# EAGLE board TestFanTachoInterrupt (EAGLE 6.1)
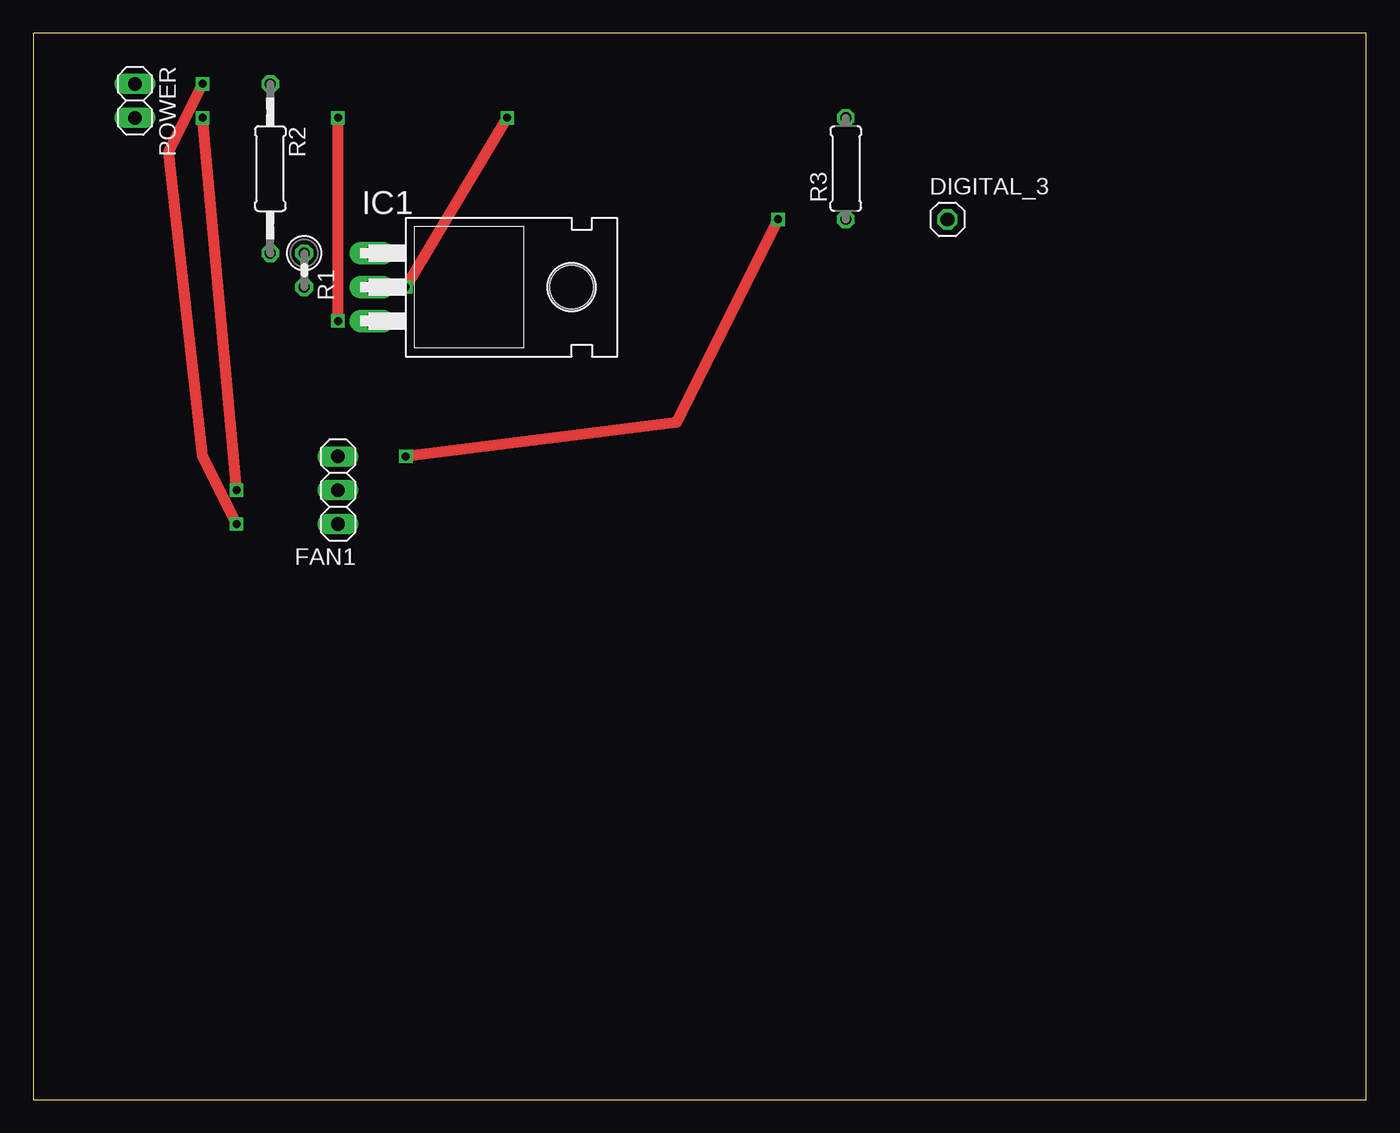
[diagram p0: board, top side]
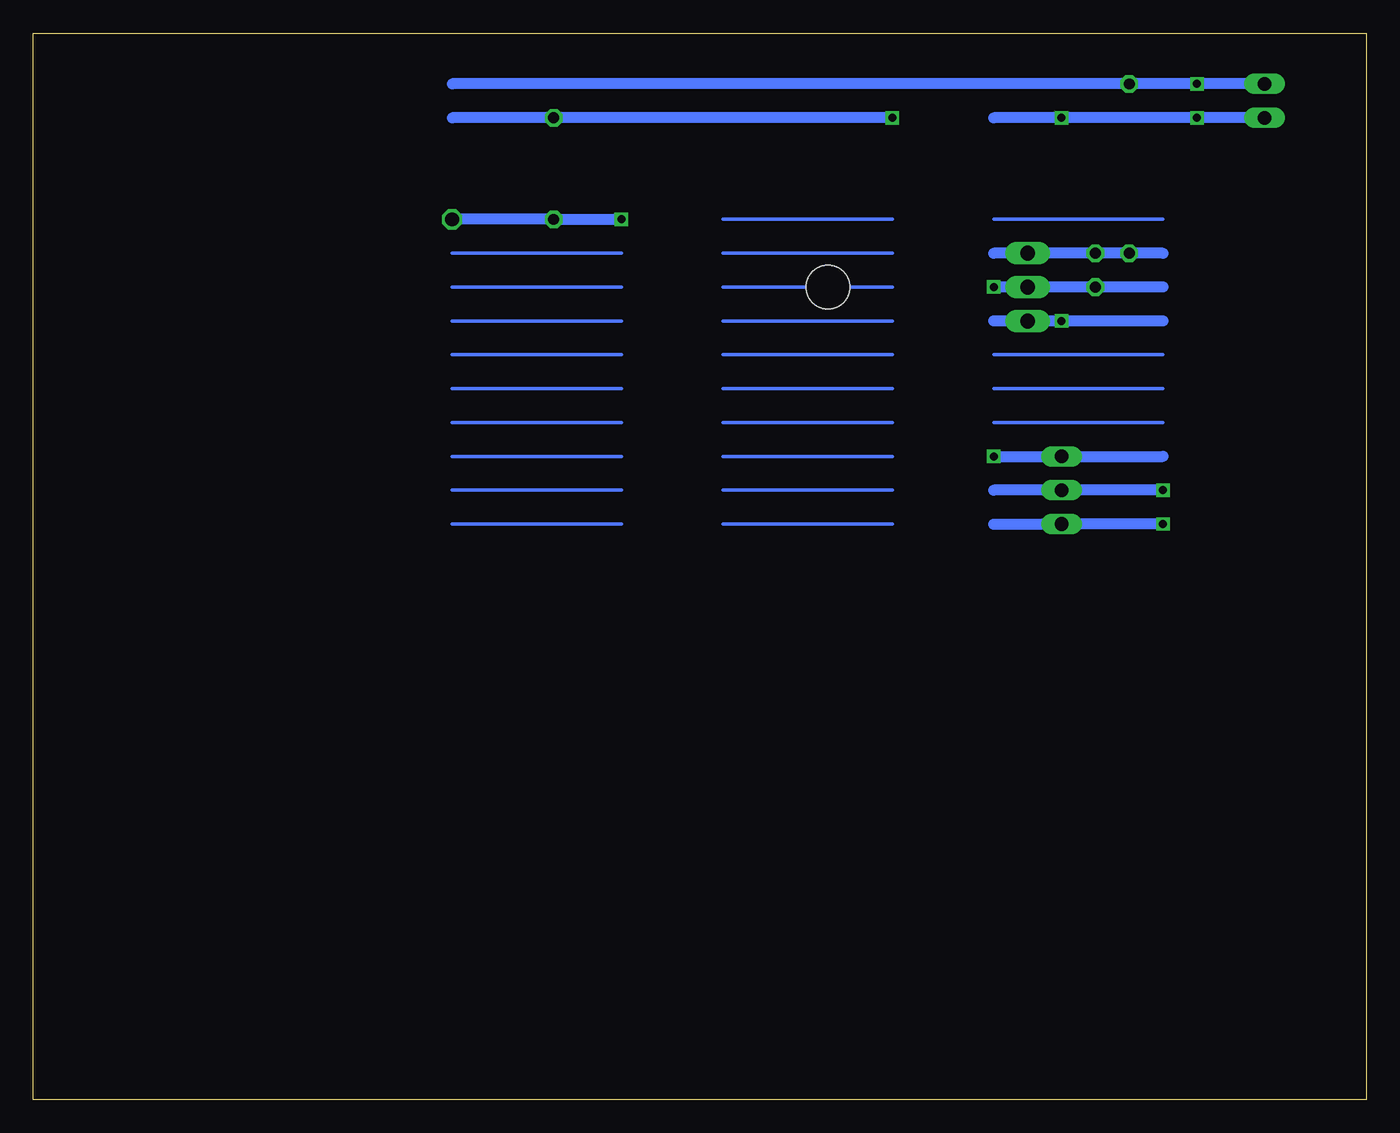
[diagram p1: board, bottom side, seen from below]

Size 100 x 80 mm. Coordinates in mm from the lower left corner, seen from the top.
Outline: 0,0 100,0 100,80 0,80 0,0
Copper layers (1*16): Top 0.035mm / dielectric 1.5mm / Bottom 0.035mm
Design rules: minimum track width 10mil, minimum drill 24mil, track to track 8mil, track to pad 8mil, pad to pad 8mil, via to via 8mil, smd to smd 8mil, copper to edge 40mil, drill to drill 8mil, minimum pad ring 10mil, minimum via ring 8mil, stop-mask expansion 4mil, vias tented up to drill 0mil, thermal gap 10mil

## Footprints (pad centres in the part's own frame; a part is rotated, then mirrored left to right if it is on the bottom)
1X01 = drill 1.016 octagon: 1 0,0
1X03 = drill 1.016 long: 1 -2.54,0; 2 0,0; 3 2.54,0
TO220H = drill 1.118 long: 1 -2.54,-10.16; 2 0,-10.16; 3 2.54,-10.16 | hole 3.302: 0,4.826
1X02 = drill 1.016 long: 1 -1.27,0; 2 1.27,0
0207/2V = drill 0.813 octagon: 1 -1.27,0; 2 1.27,0
0207/12 = drill 0.813 octagon: 1 -6.35,0; 2 6.35,0
0207/7 = drill 0.813 octagon: 1 -3.81,0; 2 3.81,0

## Placement (x,y rotation side)
DIGITAL_3  [1X01]  68.58,66.04 0 top
FAN1  [1X03]  22.86,45.72 270 top
IC1  317T  [TO220H]  35.56,60.96 270 top
POWER  [1X02]  7.62,74.93 270 top
R1  330  [0207/2V]  20.32,62.23 270 top
R2  1k  [0207/12]  17.78,69.85 270 top
R3  10k  [0207/7]  60.96,69.85 90 top

## Library data of the parts
DIGITAL_3 FAN1 = pinhead
IC1 POWER = Rodentometer
R1 = EnigmaMon
R2 R3 = rcl

## Nets
+12V: FAN1.2 IC1.3 POWER.2
FAN1_TACHO: DIGITAL_3.1 FAN1.1 R3.1
GND: FAN1.3 POWER.1 R2.1
N$1: IC1.1 R1.1 R2.2
VCC: IC1.2 R1.2 R3.2

## Tracks (layer width: path | path; a pad name or v marks a point on that pad's centre or on a via)
+12V  (via drill 0.6)
  Top 0.813: v22.86,58.42 v22.86,73.66 | v15.24,45.72 v12.7,73.66
  Bottom 0.406: IC1.3 v22.86,58.42
  Bottom 0.813: POWER.2 v12.7,73.66 v22.86,73.66 27.94,73.66 | v15.24,45.72 FAN1.2 27.94,45.72
FAN1_TACHO  (via drill 0.6)
  Top 0.813: v55.88,66.04 48.26,50.8 v27.94,48.26
  Bottom 0.813: DIGITAL_3.1 R3.1 v55.88,66.04 | v27.94,48.26 FAN1.1 15.24,48.26
GND  (via drill 0.6)
  Top 0.813: v15.24,43.18 12.7,48.26 10.16,71.12 v12.7,76.2
  Bottom 0.813: POWER.1 v12.7,76.2 R2.1 68.58,76.2 | v15.24,43.18 FAN1.3 27.94,43.18
N$1
  Bottom 0.406: R2.2 R1.1 IC1.1
N$2
  Bottom 0.254: 35.56,66.04 48.26,66.04
N$3
  Bottom 0.254: 15.24,66.04 27.94,66.04
N$4
  Bottom 0.813: 15.24,63.5 27.94,63.5
N$5
  Bottom 0.813: 15.24,58.42 27.94,58.42
N$6
  Bottom 0.254: 15.24,55.88 27.94,55.88
N$7
  Bottom 0.254: 15.24,53.34 27.94,53.34
N$8
  Bottom 0.254: 15.24,50.8 27.94,50.8
N$10
  Bottom 0.254: 35.56,63.5 48.26,63.5
N$12
  Bottom 0.254: 35.56,60.96 48.26,60.96
N$13
  Bottom 0.254: 35.56,58.42 48.26,58.42
N$14
  Bottom 0.254: 35.56,55.88 48.26,55.88
N$15
  Bottom 0.254: 35.56,53.34 48.26,53.34 | 35.56,50.8 48.26,50.8 | 35.56,48.26 48.26,48.26 | 35.56,45.72 48.26,45.72 | 35.56,43.18 48.26,43.18
N$17
  Bottom 0.254: 55.88,63.5 68.58,63.5
N$18
  Bottom 0.254: 55.88,60.96 68.58,60.96
N$19
  Bottom 0.254: 55.88,58.42 68.58,58.42
N$20
  Bottom 0.254: 55.88,55.88 68.58,55.88 | 55.88,50.8 68.58,50.8 | 55.88,48.26 68.58,48.26 | 55.88,45.72 68.58,45.72 | 55.88,43.18 68.58,43.18
N$21
  Bottom 0.254: 55.88,53.34 68.58,53.34
VCC  (via drill 0.6)
  Top 0.813: v27.94,60.96 v35.56,73.66
  Bottom 0.406: R1.2 IC1.2 v27.94,60.96
  Bottom 0.813: v35.56,73.66 R3.2 68.58,73.66 | 15.24,60.96 v27.94,60.96